# EAGLE board Headphone-Amplifier-ClassAB-13x6 (EAGLE 7.2.0)
4x4 - Three Transistor Headphone Amplifier - Class AB http://www.electronics-diy.com/4x4.php
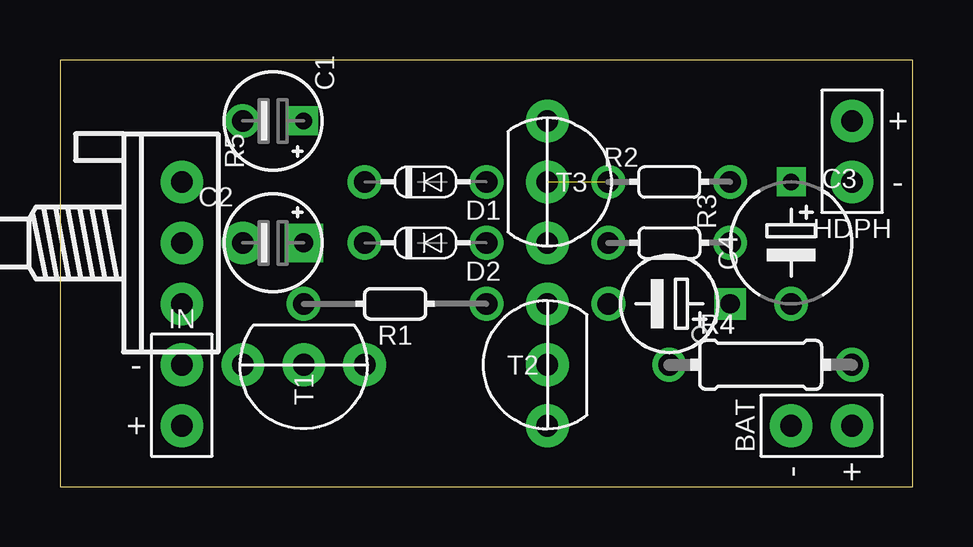
[diagram p0: board, top side]
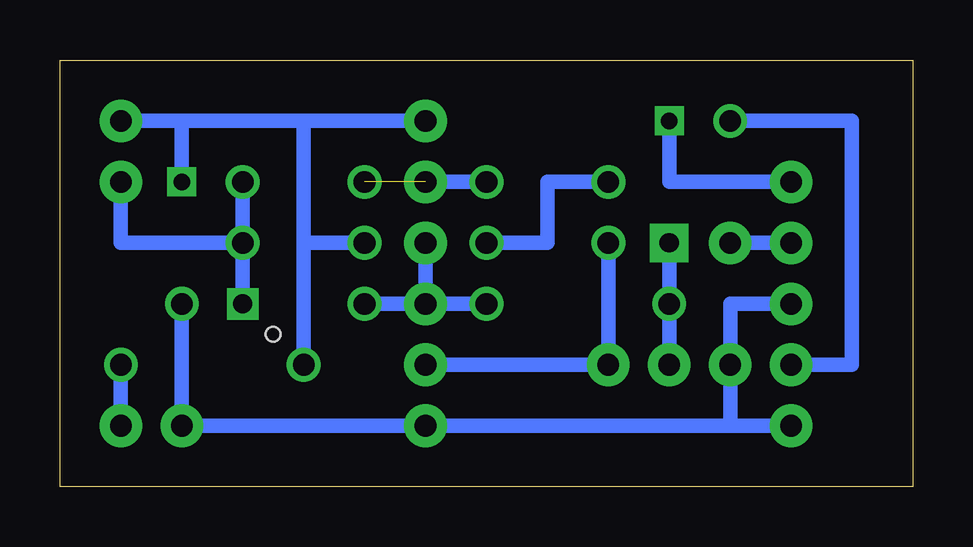
[diagram p1: board, bottom side, seen from below]

Size 35.56 x 17.78 mm. Coordinates in mm from the lower left corner, seen from the top.
Outline: 0,0 35.56,0 35.56,17.78 0,17.78 0,0
Copper layers (1*16): Top 0.035mm / dielectric 1.5mm / Bottom 0.035mm
Design rules "default": minimum track width 10mil, minimum drill 24mil, track to track 8mil, track to pad 8mil, pad to pad 8mil, via to via 8mil, smd to smd 8mil, copper to edge 40mil, drill to drill 8mil, minimum pad ring 10mil, minimum via ring 8mil, stop-mask expansion 4mil, vias tented up to drill 0mil, thermal gap 10mil
Net classes: 0 default: width 0.61 mm
Holes 0.6 mm at 26.67,6.35

## Footprints (pad centres in the part's own frame; a part is rotated, then mirrored left to right if it is on the bottom)
SPAD+- = drill 0.9 pad 1.778: 1 0,-1.27; 2 0,1.27
E2.5-4/V = drill 0.7 square: + 0,1.27 | drill 0.9: - 0,-1.27
E2,5-4 = drill 0.8 pad 1.6 square: + 0,1.27 | drill 0.9 pad 1.778: - 0,-1.27
E5-5/V = drill 0.7 square: + 0,2.54 | drill 0.9: - 0,-2.54
E5-4 = drill 0.8 square: + 0,2.54 | drill 0.9: - 0,-2.54
DO34-5 = drill 0.9: A 2.54,0; C -2.54,0
0202/7 = drill 0.9: 1 0,3.81; 2 0,-3.81
0202/5 = drill 0.9: 1 -2.54,0; 2 2.54,0
0202/5-V = drill 0.9: 1 0,2.54; 2 0,-2.54
0204/7 = drill 0.9: 1 -3.81,0; 2 3.81,0
POT = drill 0.9 pad 1.778: 1 -2.54,0; 2 0,0; 3 2.54,0
TO92-CBE = drill 0.9 pad 1.778: B 0,0; C 0,2.54; E 0,-2.54

## Placement (x,y rotation side)
BAT  SPAD+-+-  [SPAD+-]  31.75,2.54 270 top
C1  4.7μF  [E2.5-4/V]  8.89,15.24 270 top
C2  4.7μF  [E2,5-4]  8.89,10.16 270 top
C3  100-1000μF  [E5-5/V]  30.48,10.16 0 top
C4  220μF  [E5-4]  25.4,7.62 270 top
D1  1N4148  [DO34-5]  15.24,12.7 0 top
D2  1N4148  [DO34-5]  15.24,10.16 0 top
HDPH  SPAD+-+-  [SPAD+-]  33.02,13.97 0 top
IN  SPAD+-+-  [SPAD+-]  5.08,3.81 180 top
R1  100kΩ  [0202/7]  13.97,7.62 90 top
R2  330Ω  [0202/5]  25.4,12.7 0 top
R3  100Ω  [0202/5-V]  25.4,10.16 270 top
R4  22Ω  [0204/7]  29.21,5.08 0 top
R5  100kΩ  [POT]  5.08,10.16 270 top
T1  BC547  [TO92-CBE]  10.16,5.08 270 top
T2  BC557  [TO92-CBE]  20.32,5.08 180 top
T3  BC547  [TO92-CBE]  20.32,12.7 0 top

## Library data of the parts
BAT HDPH IN = pad
C1-C4 = c
D1 D2 = d
R1-R5 = r
T1-T3 = t

## Nets
GND: BAT.1 C3.- IN.2 R5.3 T1.E T2.C
N$1: D1.A R2.1 T3.B
N$2: D2.C T1.C T2.B
N$3: D1.C D2.A
N$4: C4.- R1.2 T2.E T3.E
N$5: C1.+ R5.1
N$6: C2.- R5.2
N$7: C2.+ R1.1 T1.B
N$8: C3.+ HDPH.2 R3.2 R4.1 T3.C
N$9: C4.+ HDPH.1 R2.2 R3.1
N$10: C1.- IN.1
V+: BAT.2 R4.2

## Tracks (layer width: path | path; a pad name or v marks a point on that pad's centre or on a via)
GND
  Bottom 0.61: C3.- BAT.1 T2.C 7.62,2.54 | 7.62,2.54 T1.E 7.62,7.62 R5.3 | IN.2 7.62,2.54
N$1  (1 unrouted)
  Bottom 0.61: D1.A T3.B
N$2
  Bottom 0.61: D2.C T1.C T2.B
N$3
  Bottom 0.61: D2.A 15.24,10.16 15.24,12.7 D1.C
N$4
  Bottom 0.61: C4.- R1.2 T2.E T3.E
N$5
  Bottom 0.61: R5.1 10.16,12.7 C1.+
N$6
  Bottom 0.61: C2.- R5.2
N$7
  Bottom 0.61: T1.B R1.1 C2.+
N$8
  Bottom 0.61: 25.4,15.24 T3.C | HDPH.2 30.48,15.24 | 25.4,10.16 R4.1 | C3.+ 30.48,15.24 | 30.48,15.24 25.4,15.24 | 25.4,15.24 25.4,10.16 | 25.4,10.16 R3.2
N$9
  Bottom 0.61: C4.+ R3.1 | R3.1 33.02,10.16 HDPH.1 | R2.2 R3.1
N$10
  Bottom 0.61: IN.1 2.54,5.08 2.54,15.24 C1.-
V+
  Bottom 0.61: R4.2 BAT.2